# Altium PCB Vario_pcb_2l.PcbDoc (part 2 of 2)
Units mil, origin at the board's own origin, x right, y up, seen from the top; angles counter-clockwise.
Board outline 2755.91 x 1968.5 mil, 2 copper layers (Top Layer, Bottom Layer), stack 34.296 mil thick; 124 components, 101 nets, 543 pads, 304 vias.
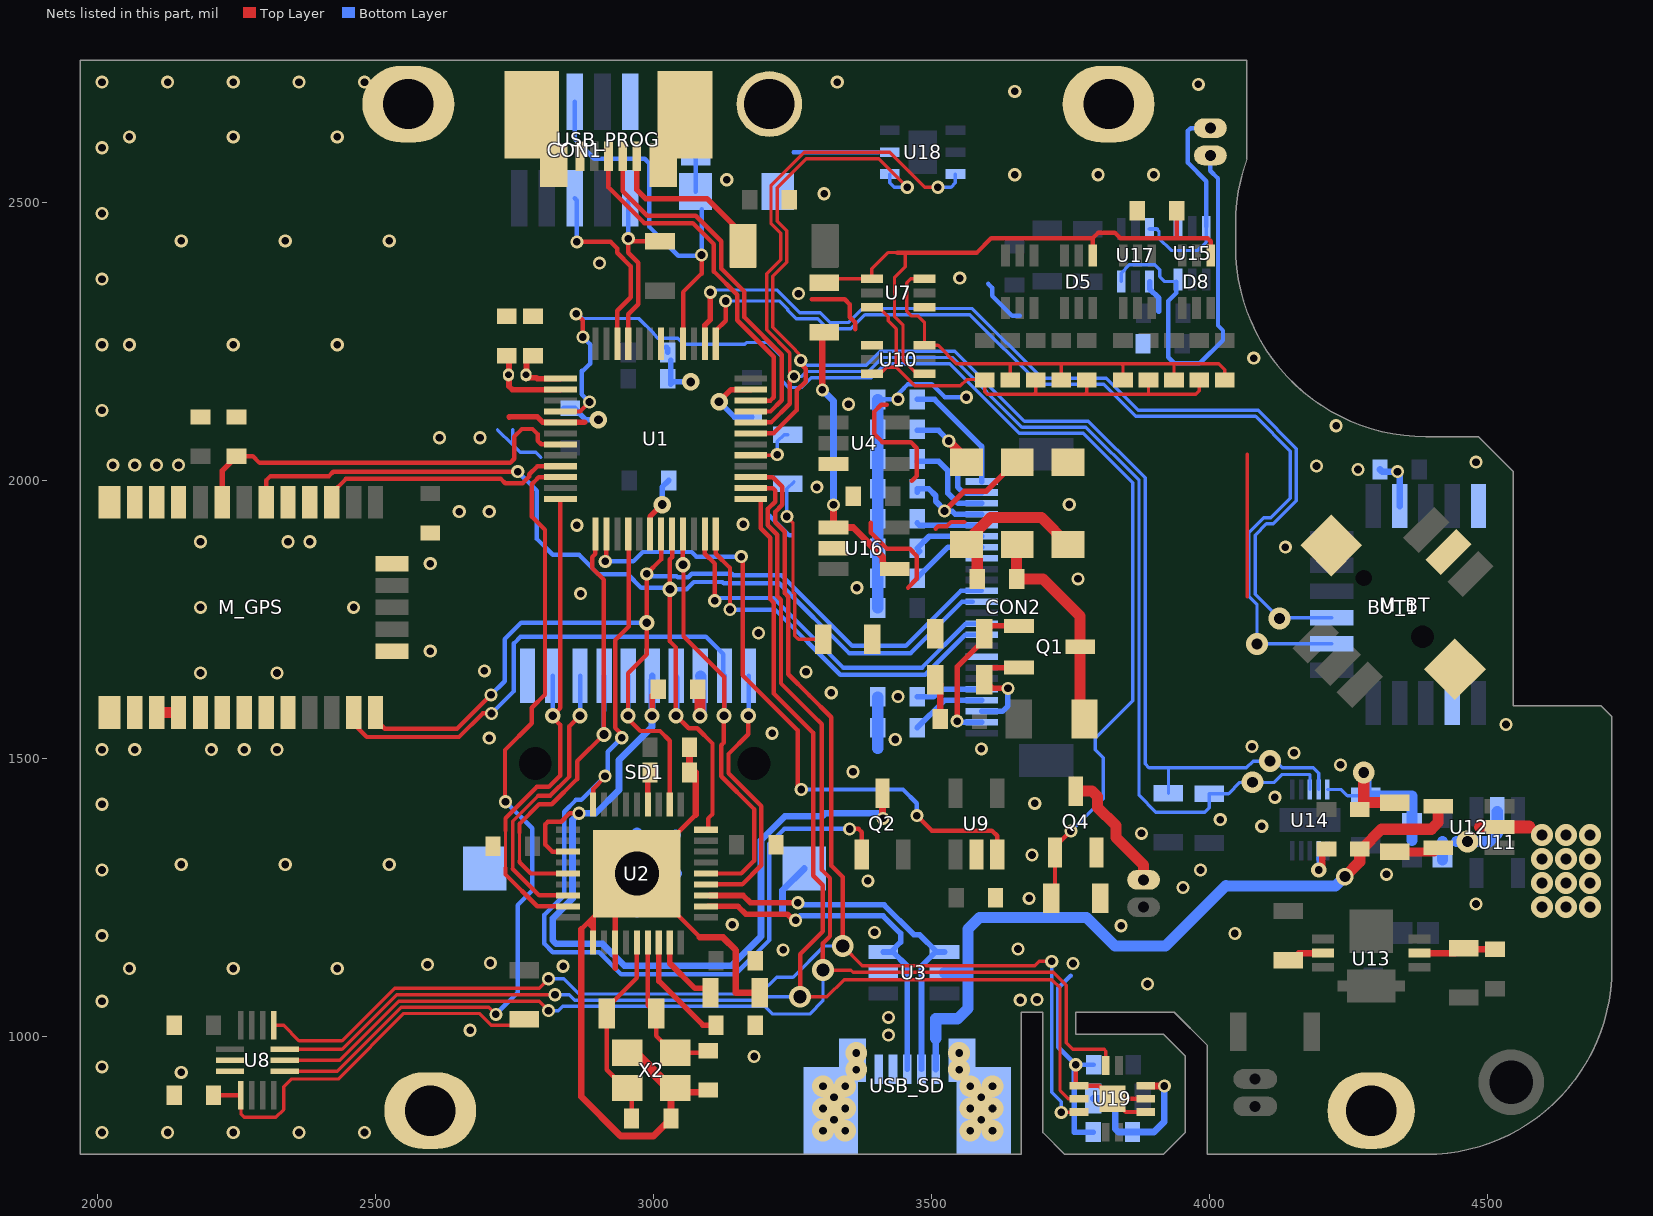
[diagram p2: the nets of this part, all layers, seen from the top]

## Via types
v1: diameter 23.62, hole 13.78, Top Layer to Bottom Layer, tented both sides, 227 vias
v2: diameter 39.37, hole 19.68, Top Layer to Bottom Layer, tented both sides, 22 vias
v3: diameter 39.37, hole 13.78, Top Layer to Bottom Layer, 20 vias
v4: diameter 31.5, hole 15.75, Top Layer to Bottom Layer, tented both sides, 10 vias
v5: diameter 27.56, hole 15.75, Top Layer to Bottom Layer, tented both sides, 9 vias
v6: diameter 31.5, hole 19.68, Top Layer to Bottom Layer, tented both sides, 5 vias
v7: diameter 39.37, hole 19.68, Top Layer to Bottom Layer, 4 vias
v8: diameter 39.37, hole 23.62, Top Layer to Bottom Layer, 3 vias
v9: diameter 27.56, hole 15.75, Top Layer to Bottom Layer, 3 vias
v10: diameter 27.56, hole 13.78, Top Layer to Bottom Layer, tented both sides, 1 vias

## Nets (pads, with @x,y where several pads share a name; then routed paths per layer and width w, separated by ;. In a path a pad name is that pad's centre, name@x,y a point inside that pad or via, vN(x,y) a via of type N, cw(c..) or ccw(c..) an arc to the next point about the centre after c; other vN are vias at no path point) (continued)
DISP_D/C: CON2.14 U1.23 | length 707.8
  Top Layer w8: U1.23@3092.52,1903.54 3092.52,1868.11 3110.24,1850.39 v1(3110.24,1783.46)
  Bottom Layer w8: v1(3110.24,1783.46) 3110.24,1781.2 3114.72,1776.72 3114.72,1787.94 3115.3,1788.53 3216.11,1788.53 3341.24,1663.39 3483.34,1663.39 3562.08,1742.13 CON2.14@3590.55,1742.13
DISP_RST: CON2.15 U1.24 | length 677.6
  Top Layer w8: U1.24@3112.2,1903.54 3112.2,1868.11 3137.8,1842.52 v1(3137.8,1767.72)
  Bottom Layer w8: v1(3137.8,1767.72) 3218.53,1767.72 3335.86,1650.39 3488.97,1650.39 3561.02,1722.44 CON2.15@3590.55,1722.44
GDR: CON2.23 Q1.1 R6.1 | length 298.6
  Top Layer w10: v1(3546.34,1566.93) 3546.34,1664.45 3595.47,1713.58 R6.1@3595.47,1724.41 3609.25,1738.19 Q1.1@3657.48,1738.19
  Bottom Layer w10: v1(3546.34,1566.93) 3546.34,1560.12 3551.18,1564.96 CON2.23@3590.55,1564.96
GND: B1.1 BUT1.5 BUT1.7 BUT1.8 C11.1 C12.1 C13.1 C14.1 C15.1 C16.1 C17.1 C18.1 C19.1 C20.2 C21.1 C22.1 C23.1 C24.1 C25.1 C26.1 C27.1 C28.1 C29.2 C30.2 C31.2 C32.1 C33.1 C34.1 C35.1 C36.2 C37.2 C38.1 C39.2 C40.1 C41.1 C43.1 C44.1 C47.1 C51.2 C52.2 C53.1 C54.2 C55.1 C56.1 C58.1 C59.1 C60.1 CON1.10 CON2.8 CON2.17 D1.K M_BT.2 M_BT.13 M_GPS.4 M_GPS.5 M_GPS.10 M_GPS.11 M_GPS.12 M_GPS.13 M_GPS.14 M_GPS.15 M_GPS.18 M_GPS.19 M_GPS.20 M_GPS.21 M_GPS.22 M_GPS.27 M_GPS.31 pad.2 pad.3@2559.06,2677.17 pad.3@3208.66,2677.17 pad.3@3818.9,2677.17 pad.3@4291.34,866.14 Q4.2 R6.2 R7.2 R8.2 R9.1 R10.2 R12.1 R13.1 SD1.6 SD1.CD2 SD1.fix U1.5 U1.18 U1.35 U1.42 U2.28 U2.30 U2.PAD U3.2 U4.3 U7.1 U8.6 U8.7 U9.2 U10.1 U11.2 U12.2 U14.5 U15.1 U16.2 U17.1 U18.2 U19.3 U19.8 U19.9 U19.PAD USB_PROG.5 USB_PROG.6 USB_SD.4 USB_SD.5 USB_SD.6 X2.2 X2.4 | length 6433.5
  Top Layer w6: 4068.12,1790.15 4068.12,2047.24
  Top Layer w8: 2870.08,1192.55 U2.PAD@2970.31,1292.79 3076,1398.47 ; U2.PAD@2970.31,1291.53 3083.92,1177.92 ; 3285,2326 3344,2326 3353.39,2316.61 3353.39,2293.7 3363,2284.09 3363,2272 ; 3391,1923.83 3391,1906.26 3420.26,1877 3461,1877 3474,1864 3474,1823 3458,1807 ; 3420,2136 3409.82,2136 3397,2123.18 3397,2084 3412,2069 3463,2069 3474,2058 3474,2008 3465,1999 ; 3507.87,1913.39 3512.39,1917.9 3528.14,1917.9 3535.43,1925.2 3559.06,1925.2 ; v1(3759.84,948.82) 3759.84,916.88 U19.3@3765.72,911 3802.14,911 U19.PAD@3825.76,887.38 ; U19.8@3885.8,863.76 3849.39,863.76 U19.PAD@3825.76,887.38 ; U19.9@3885.8,887.38 U19.PAD@3825.76,887.38
  Top Layer w10: 2740.71,2114.17 2740.97,2114.43 2791.08,2114.43 2801.18,2104.33 U1.5@2832.68,2104.33 2875.98,2104.33 ; 2885.88,1201.34 2891.57,1195.64 ; U2.28@2891.57,1168.77 2891.57,1195.64 ; 2891.57,1212.79 2891.57,1195.64 ; 2930.94,1122.24 U2.30@2930.94,1164.83 ; U2.30@2930.94,1168.77 2930.94,1252.16 U2.PAD@2970.31,1291.53 ; U1.18@2994.09,1903.54 2994.09,1935.04 v4(3015.75,1956.69) ; v4(3118.11,2141.73) 3139.76,2163.39 U1.35@3175.2,2163.39
  Top Layer w12: 2870.08,1192.55 2870.08,891.39 2940.94,820.52 3000,820.52 C29.2@3031.5,852.02 3031.5,899.26 C20.2@3098.43,899.26 ; U2.PAD@2970.31,1291.53 U2.PAD@2970.31,1292.79 ; C24.1@3064.8,1519.87 C25.1@3064.8,1474.44 3076,1474.44 3076,1398.47 ; 3083.92,1177.92 3125.08,1177.92 3148,1155 3148,1078.5 3148.5,1078 R10.2@3191.29,1078 ; R7.2@3506.89,1641.73 3515.75,1632.87 C58.1@3515.75,1570.87
  Top Layer w16: BUT1.5@4430.23,1871.18 BUT1.5@4434.17,1871.18
  Top Layer w20: X2.2@2960.63,978 X2.2@2952.76,970.13 2965.87,970.13 3028.87,907.13 X2.4@3039.37,907.13 ; C27.1@3079.72,1624.05 3083.67,1620.1 v5(3083.67,1576.8) ; v2(4277.99,1474.84) 4277.99,1420.28 R12.1@4333.66,1420.28 ; 4486.65,1376.42 U12.2@4522.09,1376.42
  Top Layer w23.62: U12.2@4522.09,1376.42 4574.8,1376.42
  Bottom Layer w6: 2719.42,2091.54 2747,2063.96 ; 2747,2091 2747,2063.96 ; 2797.24,2041.34 2788.02,2050.56 2779.36,2050.56 2770.32,2050.56 2760.4,2050.56 2747,2063.96 ; U14.5@4212.6,1443.9 4237.2,1443.9 4248.58,1432.52 R13.1@4281.93,1432.52
  Bottom Layer w8: 3209,1936.57 3244.57,1901 3249,1901 ; 3251.97,2590.55 3405.51,2590.55 ; C19.1@3403.54,2145.67 3430.67,2145.67 3451.63,2166.63 3451.63,2167.11 3457.9,2173.39 3500.61,2173.39 3524.4,2149.6 v1(3562.99,2149.6) ; 3602,2354 3609.18,2346.82 3609.18,2332.28 3645.46,2296 3659,2296 ; 3750.98,1109.25 3728.54,1086.8 3728.54,980.13 v1(3759.84,948.82) C32.1@3792.32,948.82
  Bottom Layer w10: C11.1@2838.58,2129.92 2858.08,2129.92 2879,2109 v4(2901,2109) ; v4(3015.75,1956.69) 3015.75,1988.19 C52.2@3027.56,2000 ; C13.1@3023.13,2239.66 3025.59,2237.2 C13.1@3025.59,2230.32 ; C13.1@3031.5,2216.54 3031.5,2173.23 3035.43,2177.17 v4(3066.93,2177.17) ; v4(3118.11,2141.73) 3145.67,2114.17 C53.1@3177.17,2114.17 ; v1(3759.84,948.82) 3757.03,946.01 3757.03,827.67 C38.1@3791.09,827.67 ; U17.1@3892.7,2357.83 3892.7,2344.76 3909.45,2328.02 3909.45,2304.39
  Bottom Layer w12: v1(3141.73,1200.79) v1@3145.67,1204.72 ; 3232.28,1224.19 3232.28,1262.71 SD1.fix@3271.5,1301.92 ; C39.2@4307.09,2019.68 4311.02,2015.75 v1(4338.58,2015.75) 4342.52,2011.81 M_BT.13@4342.52,1953.94
  Bottom Layer w20: 2923.23,1339.87 U2.PAD@2970.31,1292.79 ; 2928.24,1250.72 U2.PAD@2970.31,1292.79 ; 2970.31,1223.27 U2.PAD@2970.31,1292.79 ; 2970.31,1365.98 U2.PAD@2970.31,1292.79 ; 3026.88,1236.22 U2.PAD@2970.31,1292.79 ; 3039.37,1361.84 U2.PAD@2970.31,1292.79 ; 3041.8,1292.79 U2.PAD@2970.31,1292.79 ; SD1.6@3084.49,1648.38 3085.63,1647.24 v5@3085.63,1575.82 ; 3403.54,1517.72 C40.1@3403.54,1555.12 C44.1@3403.54,1610.67 ; C59.1@3403.54,1770.56 C12.1@3403.54,1824.15 C14.1@3403.54,1877.73 C15.1@3403.54,1931.32 C16.1@3403.54,1984.91 C17.1@3403.54,2038.5 C18.1@3403.54,2092.08 C19.1@3403.54,2145.67 ; v2@4282.05,1474.84 v2(4277.99,1474.84) 4281.93,1470.91 R13.1@4281.93,1432.52 4364.61,1432.52 C41.1@4364.61,1388.23 4364.61,1351.93 ; C28.1@4419.72,1317.36 4419.72,1350.39 ; v2@4444.88,1350.39 v2(4464.56,1350.39) 4500.87,1350.39 4502.4,1348.86 4518.15,1364.61 U11.2@4518.15,1403.98
  other v1: 2007.87,826.77 2125.98,826.77 2244.09,826.77 2362.2,826.77 2480.32,826.77 2150.59,935.04 2007.87,944.88 3181.1,963.58 3423,1002 2670.28,1010.83 3423,1034 2007.87,1062.99 3660,1065 3690,1066 3889,1094 2057.09,1122.05 2244.09,1122.05 2431.1,1122.05 2837.6,1125.98 2593.5,1128.94 3754.92,1130.91 2706.69,1131.89 3233.27,1155.51 3656,1157 2007.87,1181.1 4046,1185 3397.64,1187.01 3841.54,1198.82 4480,1238 3676,1248 3952.76,1267.72 3385.83,1279.53 4318.9,1291.34 2007.87,1299.21 3984.25,1299.21 2150.59,1309.06 2337.6,1309.06 2524.61,1309.06 3681,1326 3878,1365 4094.49,1377.95 4019.68,1389.76 2007.87,1417.32 3686,1419 4118.11,1430.12 3359,1476 4236.22,1488.19 4152.56,1509.84 2007.87,1515.75 2066.93,1515.75 2204.72,1515.75 2263.78,1515.75 2322.83,1515.75 3590,1517 4077,1521 3435,1534 2704.72,1536.42 3213.58,1545.28 4534,1561 3440,1611 3319.88,1618.11 2185.04,1653.54 2322.83,1653.54 3274.61,1655.51 2695.87,1657.48 2598.43,1692.91 3188.98,1725.39 2185.04,1771.65 2460.63,1771.65 2869.09,1796.26 3366,1807 3763.78,1822.83 2598.43,1850.39 4137,1880 2185.04,1889.76 2342.52,1889.76 2381.89,1889.76 2862.2,1919.29 3161.42,1921.26 2650.59,1943.9 2704.72,1943.9 3748.03,1956.69 3294,1988 4267.72,2019.68 4193,2026 2027.56,2027.56 2066.93,2027.56 2106.3,2027.56 2145.67,2027.56 4480,2033 2615.16,2076.77 2687.99,2076.77 4228.35,2098.43 2007.87,2125.98 3351,2137 3440,2146 4080,2220 2007.87,2244.09 2057.09,2244.09 2244.09,2244.09 2431.1,2244.09 3261,2336 2007.87,2362.2 3551,2364 2903,2391 2150.59,2431.1 2337.6,2431.1 2524.61,2431.1 2007.87,2480.31 3307.09,2515.75 3132,2541 3650,2550 3800,2550 3900,2550 2007.87,2598.43 2057.09,2618.11 2244.09,2618.11 2431.1,2618.11 3650,2700 3980.32,2712.6 2007.87,2716.54 2125.98,2716.54 2244.09,2716.54 2362.2,2716.54 2480.32,2716.54 3330.71,2716.54
  other v2: 4598.43,1232.28 4641.73,1232.28 4685.04,1232.28 4598.43,1275.59 4641.73,1275.59 4685.04,1275.59 4598.43,1318.9 4641.73,1318.9 4685.04,1318.9 4598.43,1362.2 4641.73,1362.2 4685.04,1362.2
  other v3: 3305,830 3345,830 3570,830 3610,830 3325,850 3590,850 3305,870 3345,870 3570,870 3610,870 3325,890 3590,890 3305,910 3345,910 3570,910 3610,910 3365,940 3550,940 3365,970 3550,970
GPS_BCKP: C35.2 M_GPS.8 U1.7 | length 747.9
  Top Layer w8: C35.2@2250,2043.31 2279.53,2043.31 2291.34,2031.5 2742.22,2031.5 2749.86,2039.13 2749.86,2078.99 2763.39,2092.52 2782.48,2092.52 2791.48,2083.52 2791.48,2071.52 2798.04,2064.96 U1.7@2832.68,2064.96
  Top Layer w10: M_GPS.8@2224.41,1960.63 2224.41,2017.72 C35.2@2250,2043.31
GPS_CS: M_GPS.3 U1.9 | length 456.8
  Top Layer w8: M_GPS.3@2421.26,1960.63 2421.26,1977.29 2446.71,2002.75 2725.6,2002.75 2733.41,1994.94 2764.53,1994.94 2776.72,2007.13 2776.72,2010.97 2791.34,2025.59 U1.9@2832.68,2025.59
HEAT: Q4.1 R8.1 U1.4 | length 2253.6
  Top Layer w8: U1.4@2832.68,2124.02 2868.02,2124.02 v1(2885,2141) ; v1(2860.91,2299.62) 2861.8,2299.62 2873,2288.42 v1(2873,2258) ; R8.1@3715.55,1248.03 3722.44,1254.92 Q4.1@3722.44,1330.71 3722.44,1340.55 v1(3751,1369.11)
  Bottom Layer w6: v1(2860.91,2299.62) 2864.72,2299.62 2873,2291.34 2973.66,2291.34 3000.18,2264.82 3000.18,2263.6 3007.75,2256.03 3043.76,2256.03 3054.88,2244.91 3164.08,2244.91 3167.33,2248.16 3205.48,2248.16 3232,2221.64 3232,2179 3243.81,2167.19 3266.17,2167.19 3283.98,2185 3391.81,2185 3417,2210.19 3533.01,2210.19 3658.42,2084.77 3773.5,2084.77 3862.64,1995.63 3862.64,1603.64 3795.15,1536.15 3795.15,1515.42 3809.34,1501.23 3809.34,1427.45 v1(3751,1369.11)
  Bottom Layer w8: v1(2873,2258) 2886,2245 2886,2210 2873,2197 2871.27,2197 2871.27,2154.73 v1(2885,2141)
IMU_CS: U1.10 U8.12 | length 1530.8
  Top Layer w6: U8.12@2336.61,937.01 2431.45,937.01 2546.44,1051.99 2703.91,1051.99 v1(2716.53,1039.37)
  Top Layer w8: v1(2734,1422) 2733,1423 2733,1515 2781.15,1563.15 2781.15,1591.01 2804.91,1614.78 2804.91,1911.28 2781.15,1935.04 2781.15,1993.18 2789.72,2001.74 2789.72,2002.31 2793.31,2005.91 U1.10@2832.68,2005.91
  Bottom Layer w8: v1(2716.53,1039.37) 2755.72,1078.55 2755.72,1236.03 2782,1262.31 2782,1374 v1(2734,1422)
LED: D9.1 U1.29 | length 96
  Top Layer w6: U1.29@3175.2,2045.28 3221.74,2045.28 v1(3222.86,2046.4)
  Bottom Layer w6: v1(3222.86,2046.4) 3222.86,2070.14 3235.02,2082.29 D9.1@3242,2082.29
MISO: M_GPS.25 SD1.7 U1.21 U2.5 | length 1688.6
  Top Layer w8: M_GPS.25@2460.63,1582.68 2460.63,1561.76 2484,1538.39 2650.24,1538.39 2692.67,1580.82 v1(2708.79,1580.82) 2713.51,1580.82 v1@2714.57,1579.76 ; U1.21@3053.15,1903.54 v9(3053.15,1848.42) 3054.13,1847.44 3054.13,1719.52 3127.8,1645.86 v5@3127.8,1576.8 ; U2.5@3098.27,1292.79 3158.25,1292.79 3181.1,1315.64 3181.1,1408.81 3122.05,1467.87 3122.05,1523.62 3126.82,1528.39 v5(3126.82,1576.8)
  Bottom Layer w8: v1(2708.79,1580.82) 2749.02,1621.04 2749.02,1706.72 2760.83,1718.54 3094.49,1718.54 3125.98,1687.04 SD1.7@3125.98,1650.19 ; v5@3127.8,1576.8 SD1.7@3127.8,1648.38
  Bottom Layer w10: SD1.7@3125.98,1650.19 SD1.7@3127.8,1648.38
MISO_IRQ: U1.27 U8.1 U19.5 | length 2779.5
  Top Layer w6: U8.1@2316.93,1019.69 2334.65,1019.69 2362.33,992 2439.77,992 2534.39,1086.61 2794.29,1086.61 v1(2811.1,1103.43) ; v8(3340.55,1162.4) 3375.95,1127 3686,1127 3693.84,1134.84 v1(3716.54,1134.84) ; v1(3733.7,863) 3764.97,863 U19.5@3765.72,863.76
  Top Layer w8: U1.27@3175.2,2005.91 3214.57,2005.91 3232,1988.47 3232,1956.43 3218.91,1943.34 3218.91,1924.86 3236,1907.77 3236,1797.3 3242.54,1790.77 3242.54,1651.17 3279.85,1613.85 3279.99,1613.85 3320,1573.84 3320,1307.09 3340.55,1286.54 v8(3340.55,1162.4)
  Bottom Layer w6: v1(2811.1,1103.43) 2838.58,1103.43 2865.95,1076.06 3191.4,1076.06 3221.55,1106.21 3251.11,1106.21 3307.3,1162.4 v8(3340.55,1162.4) ; v1(3716.54,1134.84) 3716.54,899.17 3733.7,882 v1(3733.7,863)
MOSI: CON2.11 M_GPS.26 SD1.3 U1.19 U2.11 | length 1953.3
  Top Layer w8: M_GPS.26@2500,1582.68 2500,1569.88 2516.73,1553.15 2646.62,1553.15 v1(2707.68,1614.2) ; v5(2954.24,1576.8) 2954.24,1653.24 2988,1687 v9(2988,1744.13) v1(2988,1832) 3013.78,1857.78 U1.19@3013.78,1903.54 ; v5@2956.9,1568.72 2976.38,1549.24 3011.81,1549.24 3029.37,1531.69 U2.11@3029.37,1420.74
  Bottom Layer w8: v1(2707.68,1614.2) 2732.28,1638.81 2732.28,1714.6 2761.81,1744.13 v9@2985.87,1744.13 ; v5@2954.57,1576.8 SD1.3@2954.57,1648.38 ; v1(2988,1832) 2992.19,1827.81 3041.55,1827.81 3043.71,1825.65 3062.59,1825.65 3068.94,1832 3141.18,1832 3144,1829.19 3230.6,1829.19 3357.4,1702.39 3454.26,1702.39 3553.05,1801.18 CON2.11@3590.55,1801.18
MOSI_IRQ: U1.25 U8.14 U19.4 | length 2662.7
  Top Layer w6: U8.14@2336.61,976.38 2439.71,976.38 2538.13,1074.8 v1(2822.83,1074.8) ; v8(3264,1071) 3312.14,1071 3342.95,1101.81 3716.91,1101.81 3731.47,1087.25 3731.47,902.39 3746.48,887.38 U19.4@3765.72,887.38
  Top Layer w8: U1.25@3175.2,1966.54 3192.91,1966.54 3192.91,1914.09 3210,1897 3210,1786.54 3216.54,1780 3216.54,1616.66 3287.4,1545.8 3287.4,1288.96 3304.71,1271.65 3304.71,1188.57 3264,1147.86 v8(3264,1071)
  Bottom Layer w6: v1(2822.83,1074.8) 2848.52,1074.8 2858.27,1065.06 3195.96,1065.06 3201.9,1071 v8(3264,1071)
NetC12_2: C12.2 CON2.7 | length 139.2
  Bottom Layer w10: C12.2@3474.41,1824.15 3530.18,1879.92 CON2.7@3590.55,1879.92
NetC14_2: C14.2 CON2.6 | length 132.2
  Bottom Layer w10: C14.2@3474.41,1867.89 C14.2@3479.33,1872.81 ; C14.2@3474.41,1877.73 3496.28,1899.61 CON2.6@3590.55,1899.61
NetC15_2: C15.2 CON2.5 | length 117.9
  Bottom Layer w10: C15.2@3474.41,1923.45 3478.57,1919.29 CON2.5@3590.55,1919.29
NetC17_2: C17.2 CON2.3 | length 171.6
  Bottom Layer w10: C17.2@3474.41,2034.56 3512.98,2034.56 3529.53,2018.01 3529.53,1997.37 3529.68,1997.22 3529.68,1979.15 3529.53,1979 3529.53,1977.22 3548.08,1958.66 CON2.3@3590.55,1958.66
NetC19_2: C19.2 CON2.1 | length 214.2
  Bottom Layer w10: C19.2@3474.41,2145.67 3505.91,2145.67 3590.55,2061.02 CON2.1@3590.55,1998.03
NetC20_1: C20.1 R3.2 U2.33 X2.1 | length 276.5
  Top Layer w8: U2.33@2990,1164.83 2990,1055.91 R3.2@3004.92,1040.99 3004.92,1000.64 3035.43,970.13 C20.1@3098.43,970.13
NetC25_2: C25.2 U2.13 | length 48.8
  Top Layer w10: U2.13@2990,1420.74 2990,1469.36 C25.2@2990.16,1469.52
NetC26_2: C26.2 U2.34 | length 201.3
  Top Layer w10: U2.34@3009.68,1164.83 3009.68,1099.32 3089,1020 C26.2@3112.57,1020
NetC27_2: C27.2 Q2.3 SD1.4 U2.21 | length 1652.9
  Top Layer w8: U2.21@2842.36,1332.16 2818.25,1332.16 2805.77,1344.64 2805.77,1381.56 2810.25,1386.04 2834.04,1386.04 2849.19,1401.19 v1(2866,1401.19)
  Top Layer w10: v5@2998.03,1573.85 2998.03,1613.22 C27.2@3008.86,1624.05
  Top Layer w12: Q2.3@3412,1437.12 3412,1393 v1(3413,1392)
  Bottom Layer w12: SD1.4@2997.87,1648.38 2997.87,1641 2997.38,1640.51 v5(2997.38,1576.8) 2997.38,1556.44 2937.97,1497.03 2937.97,1442.97 2896.19,1401.19 v1(2866,1401.19) 2854.33,1389.52 2854.33,1247.63 2818.9,1212.2 2818.9,1172.46 2825.19,1166.16 2908.64,1166.16 2948.01,1126.8 3140.75,1126.8 3193.66,1179.71 3193.66,1352.67 3236.8,1395.81 3304,1395.81 3309.19,1401 3410,1401 3413,1398 v1(3413,1392)
  Bottom Layer w16: v5@2998.03,1573.85 v5@3000,1571.88
NetC29_1: C29.1 R3.1 U2.32 X2.3 | length 353.6
  Top Layer w8: C29.1@2960.63,852.02 2960.63,895.37 2916.2,939.8 2916.2,1040.85 R3.1@2916.34,1040.99 2916.34,1051.34 2970.31,1105.31 U2.32@2970.31,1164.83
NetC30_1: C30.1 U1.1 X1.2 | length 106.1
  Top Layer w10: C30.1@2783.46,2224.41 2771.65,2212.6 2771.65,2188.98 2771.65,2185.04 2789.37,2185.04 2791.34,2183.07 U1.1@2832.68,2183.07
NetC31_1: C31.1 U1.2 X1.1 | length 144
  Top Layer w10: C31.1@2736.22,2216.54 2740.16,2212.6 2740.16,2185.04 2740.16,2169.29 2746.22,2163.23 2793.15,2163.23 2793.31,2163.39 U1.2@2832.68,2163.39
NetC33_2: C33.2 L3.1 U8.8 | length 709.9
  Top Layer w6: U8.8@2257.87,893.7 2257.87,860.24 2263.78,854.33 2320.77,854.33 2334.65,868.21 2334.65,909.45 2348.28,923.09 2433.09,923.09 2550.99,1040.99 2686.89,1040.99 2708.32,1019.56 2756.76,1019.56 L3.1@2767.72,1030.51
  Top Layer w8: C33.2@2208.66,893.7 U8.8@2257.87,893.7
NetC38_2: C38.2 L2.1 U19.10 | length 282
  Top Layer w12: U19.10@3885.8,911 3886.37,910.43 v1(3919.29,910.43)
  Bottom Layer w12: L2.1@3791.41,888 3816.72,888 3830.71,874.02 3830.71,833.66 3836.7,827.67 C38.2@3861.96,827.67 3900.5,827.67 3919.29,846.46 v1(3919.29,910.43)
NetC40_2: C40.2 CON2.21 | length 136.5
  Bottom Layer w10: C40.2@3474.41,1555.12 3523.62,1604.33 CON2.21@3590.55,1604.33
NetC42_2: C42.2 U14.7 | length 74.9
  Top Layer w12: v10(4196.85,1299.21) 4203.19,1305.55 C42.2@4203.19,1337.05
  Bottom Layer w8: v10(4196.85,1299.21) U14.7@4196.85,1333.66
NetC44_2: C44.2 CON2.20 | length 121.7
  Bottom Layer w10: C44.2@3474.41,1610.67 3503.66,1610.67 3517,1624.02 CON2.20@3590.55,1624.02
NetC46_2: C46.2 R11.1 U13.5 | length 130.6
  Top Layer w12: U13.5@4377.95,1149.61 4401.57,1149.61 4442.31,1149.6 R11.1@4449,1156.29 ; R11.1@4458,1158.29 4459.86,1156.43 C46.2@4514,1156.43
NetC48_1: C48.1 D3.A L1.2 Q1.3 | length 361.8
  Top Layer w20: D3.A@3654.53,1884.82 3653.54,1883.84 C48.1@3653.54,1822.83 3700.79,1822.83 3767.72,1755.91 Q1.3@3767.72,1700.79 L1.2@3767.72,1598.4
NetC48_2: C48.2 D1.A D2.K | length 296.1
  Top Layer w20: C48.2@3582.68,1822.83 3582.68,1865.14 D2.K@3562.99,1884.82 3562.99,1889.76 3606.3,1933.07 3697.81,1933.07 D1.A@3746.06,1884.82
NetCON_HEAT_2: CON_HEAT.2 Q4.3 | length 227.1
  Top Layer w20: Q4.3@3759.84,1440.94 3789.06,1440.94 3799,1431 3799,1412 3832,1379 3832,1357.89 3881.89,1308 CON_HEAT.2@3881.89,1281.5
NetD9_2: D9.2 R9.2 | length 342.5
  Top Layer w6: v1(3240,1935) 3251,1924 3251,1799.28 3254.54,1795.74 3254.54,1720.46 3261,1714 R9.2@3305.42,1714
  Bottom Layer w6: v1(3240,1935) 3240,1985 D9.2@3253,1998
NetM_GPS_16: M_GPS.16 M_GPS.17 | length 39.4
  Top Layer w20: M_GPS.16@2106.3,1582.68 M_GPS.17@2145.67,1582.68
NetR10_1: R10.1 U2.35 | length 125.6
  Top Layer w10: U2.35@3029.37,1164.83 3029.37,1131.43 3074.8,1086 R10.1@3102.71,1086
NetR12_2: R12.2 U12.5 | length 81.2
  Top Layer w16: R12.2@4333.66,1331.69 4404.53,1331.69 U12.5@4411.85,1339.02
NetR14_2: R14.2 U13.2 | length 43.3
  Top Layer w12: R14.2@4161.42,1149.61 U13.2@4204.72,1149.61
NetR18_1: R18.1 U16.1 U16.4 | length 522.1
  Top Layer w12: v1(3304,2163) 3304,2256.71 R18.1@3322,2274.71 ; v1(3324,1956) v1(3324,1956) U16.1@3324.05,1915.27 3359.48,1915.27 3412.37,1862.37 3412.37,1852.63 3424.54,1840.46 U16.4@3434.28,1840.46
  Bottom Layer w12: v1(3304,2163) 3324,2143 v1(3324,1956)
NetU2_2: U2.2 U3.3 USB_SD.3 | length 653.1
  Top Layer w10: U2.2@3098.27,1233.73 3152.13,1233.73 3166.34,1219.52 3241.11,1219.52 3251.97,1208.66 v1(3255.9,1208.66)
  Bottom Layer w10: v1(3255.9,1208.66) 3263.78,1216.54 3413.39,1216.54 3444.88,1185.04 3444.88,1169.29 U3.3@3427.17,1151.57 ; U3.3@3413.39,1151.57 U3.3@3427.17,1151.57 ; USB_SD.3@3456.69,940.94 3456.69,1125.98 3431.1,1151.57 U3.3@3427.17,1151.57
NetU2_3: U2.3 U3.4 USB_SD.2 | length 688.3
  Top Layer w10: U2.3@3100.94,1253.26 3161.42,1253.26 3174.52,1240.16 v1(3259.84,1240.16)
  Bottom Layer w10: v1(3259.84,1240.16) 3263.78,1236.22 3414.91,1236.22 3468.5,1182.63 3478.79,1182.63 U3.4@3509.84,1151.57 ; USB_SD.2@3482.28,940.94 3482.28,1125.98 3486.85,1130.55 3486.85,1131.11 3507.31,1151.57 U3.4@3509.84,1151.57 ; U3.4@3523.62,1151.57 U3.4@3509.84,1151.57
P2_0: M_BT.16
PIEZO+: CON_BUZ.2 U15.3 U17.6 | length 387.8
  Bottom Layer w6: 3905.51,2452.32 3909.45,2448.38 3909.45,2435.78 3931.41,2413.82 3979.74,2413.82 3994.78,2428.86 U15.3@3994.78,2456.06
  Bottom Layer w8: U17.6@3892.7,2452.32 3905.51,2452.32 ; U15.3@3994.78,2456.06 3994.78,2538.39 3961.61,2571.55 3961.61,2628.94 3966.54,2633.86 CON_BUZ.2@4001.97,2633.86
PIEZO-: CON_BUZ.1 U15.6 U17.3 | length 743.9
  Bottom Layer w6: U17.3@3841.52,2357.83 3841.52,2373.14 3856.19,2387.81 3902.19,2387.81 3911.19,2378.81 3911.19,2366.81 3920.17,2357.83 U15.6@3940.6,2357.83
  Bottom Layer w8: U15.6@3940.6,2357.83 3940.6,2337.22 3926.19,2322.81 3926.19,2221.81 3937.19,2210.81 3983.09,2210.81 4024.74,2252.46 4024.74,2269.7 4015.73,2278.71 4015.73,2543.32 4001.97,2557.09 CON_BUZ.1@4001.97,2584.65
POWER_ENA: U1.14 U9.3 | length 1202.3
  Top Layer w8: v1(2913.39,1854.33) 2915.35,1856.3 U1.14@2915.35,1903.54 ; v1(3158,1863) 3160.81,1860.19 3160.81,1649.23 3259.86,1550.18 3259.86,1450.14 v1(3266,1444) ; v1(3474,1397) 3501,1370 3609,1370 3618.4,1360.6 U9.3@3618.4,1326.88
  Bottom Layer w8: v1(2913.39,1854.33) 2963.77,1854.33 2980.65,1871.2 3068.9,1871.2 3077.1,1863 v1(3158,1863) ; v1(3266,1444) 3449,1444 3474,1419 v1(3474,1397)
PREVGH: C16.2 CON2.4 D3.K | length 317.1
  Top Layer w10: v1(3523.62,1944.88) 3559.06,1980.32 3598.43,1980.32 3650.57,2032.46 D3.K@3654.53,2032.46
  Bottom Layer w10: C16.2@3474.41,1979 3474.41,1980.32 C16.2@3479,1984.91 ; C16.2@3474.41,1984.91 C16.2@3479,1984.91 ; CON2.4@3590.55,1938.98 3543.31,1938.98 3537.4,1944.88 v1(3523.62,1944.88) 3523.62,1946.84 3507.87,1962.59 3507.87,1972.44 3495.41,1984.91 C16.2@3479,1984.91
PREVGL: C18.2 CON2.2 D2.A | length 253.7
  Top Layer w16: v1(3531.36,2071) 3562.99,2039.37 D2.A@3562.99,2032.46
  Bottom Layer w10: C18.2@3474.41,2090.11 3512.98,2090.11 3547.24,2055.85 3547.24,1988.19 3557.09,1978.35 CON2.2@3590.55,1978.35
PUMP+: C2.2 C4.2 C6.2 C8.2 C10.2 U7.3 U10.6 | length 864.1
  Top Layer w6: U7.3@3487.57,2362.81 3463.2,2362.81 3455.69,2355.31 3455.69,2304.63 3464.57,2295.76 3476.24,2295.76 3487.57,2284.43 U10.6@3487.57,2243 3512,2243 3545,2210 3640,2210 ; C4.2@3642.09,2180.81 3642.09,2207.91 3640,2210 ; C2.2@3733.65,2180.81 3733.65,2209.35 3733,2210 ; C10.2@3844.89,2180.81 3844.89,2206.11 3841,2210 ; C8.2@3936.44,2180.81 3936.44,2209.56 3936,2210 ; C6.2@4028,2180.81 4028,2199.38 4017.38,2210 3936,2210 ; 3640,2210 3733,2210 ; 3733,2210 3841,2210 ; 3841,2210 3936,2210
PUMP-: C1.2 C3.2 C5.2 C7.2 C9.2 U7.6 U10.3 | length 854.4
  Top Layer w6: U10.3@3393.08,2191.82 3407.82,2191.82 3419.51,2203.51 3437,2203.51 ; U7.6@3393.08,2311.63 3405.37,2311.63 3422.69,2294.31 3422.69,2286.86 3437,2272.56 3437,2203.51 ; C5.2@3579,2181.51 3563.51,2181.51 3552.19,2170.19 3470.32,2170.19 3437,2203.51 ; C5.2@3596.32,2180.81 3596.32,2159.19 3600.51,2155 3684.36,2155 ; C3.2@3687.87,2180.81 3687.87,2158.51 3684.36,2155 ; C1.2@3779.43,2180.81 3779.43,2158.49 3775.94,2155 ; C9.2@3890.67,2180.81 3890.67,2155.33 3891,2155 ; C7.2@3982.22,2180.81 3982.22,2161.6 3975.62,2155 3891,2155 ; 3684.36,2155 3775.94,2155 ; 3775.94,2155 3891,2155
PUMP_VDD: C54.1 D5.1 D8.1 R18.2 U7.4 U10.4 | length 1095.8
  Top Layer w6: R18.2@3322,2363.29 3322.48,2362.81 U7.4@3393.08,2362.81 3393.08,2381.1 3421.98,2410 3439,2410 ; 3454,2410 3453,2409 3453,2384.17 3433.69,2364.86 3433.69,2295.52 3448.88,2280.33 3448.88,2217.12 3474.18,2191.82 U10.4@3487.57,2191.82
  Top Layer w8: 3439,2410 3454,2410 3582,2410 3608,2436 3790.59,2436 ; D5.1@3790.59,2404.49 3790.59,2436 ; C54.1@3941.43,2485 3941.43,2436.57 3942,2436 ; D8.1@4002.59,2404.49 4002.59,2430.41 3997,2436 3942,2436 ; 3790.59,2436 3800.59,2446 3830,2446 3840,2436 3942,2436
RESE: CON2.22 Q1.2 R7.1 | length 210.1
  Top Layer w10: v1(3637.8,1625.98) 3611.22,1625.98 R7.1@3595.47,1641.73 3595.47,1654.53 3604.33,1663.39 Q1.2@3657.48,1663.39
  Bottom Layer w10: CON2.22@3590.55,1584.65 3627.95,1584.65 3637.8,1594.49 v1(3637.8,1625.98)
RESET: B1.2 CON1.8 R2.1 U1.40 | length 768
  Top Layer w8: U1.40@3053.15,2246.06 3053.31,2246.22 3053.31,2338.9 3086.61,2372.21 v1(3086.61,2405.51)
  Bottom Layer w8: CON1.8@2858.27,2681.26 2858.27,2614.17 2893.7,2578.74 2984.25,2578.74 2992.13,2570.87 2992.13,2456.69 3044.63,2404.19 3085.29,2404.19 v1(3086.61,2405.51) B1.2@3086.61,2488.29 ; B1.2@3075.68,2519.68 3075.79,2519.8 3075.79,2561.91 R2.1@3075.79,2581.69
RX_D: M_BT.8 U1.38 | length 1747.9
  Top Layer w10: U1.38@3092.52,2246.06 3092.67,2246.21 3092.67,2279.53 3102.36,2289.21 v1(3102.36,2338.58)
  Bottom Layer w6: v1(3102.36,2338.58) 3103.34,2338.58 3107.41,2342.65 3222.3,2342.65 3226.25,2338.7 3226.3,2338.7 3263.19,2301.81 3300.54,2301.81 3318.35,2284 3350.8,2284 3375.99,2309.19 3574.01,2309.19 3699.43,2183.77 3814.5,2183.77 3872.03,2126.24 4087.84,2126.24 4156.8,2057.29 4156.8,1963.62 4115.12,1921.94 4102.86,1921.94 4082.68,1901.77 4082.68,1795.28 v7(4126.03,1751.92) 4127.26,1753.15 M_BT.8@4220.47,1753.15
SCK: CON2.12 M_GPS.6 SD1.5 U1.20 U2.9 | length 2208.6
  Top Layer w8: M_GPS.6@2303.15,1960.63 2303.15,2000 2311.02,2007.87 2416.34,2007.87 2424.21,2015.75 v1(2755.91,2015.75) ; U1.20@3033.46,1903.54 3033.46,1861.79 3029.68,1858 v9(3029.68,1804.22) 3029.68,1710.32 3040.53,1699.47 v5(3040.53,1576.8) 3063.33,1554 3079,1554 3106.3,1526.7 3106.3,1399.75 3098.27,1391.71 U2.9@3098.27,1371.53
  Bottom Layer w8: v1(2755.91,2015.75) 2790.35,1981.3 2790.35,1894.69 2818.9,1866.14 2866.14,1866.14 2901.28,1831 2954,1831 2977.83,1807.17 3029.83,1807.17 3029.68,1807.02 v9(3029.68,1804.22) 3059.55,1804.22 3072.6,1817.28 3124.24,1817.28 3126.56,1814.96 3226.44,1814.96 3352.01,1689.39 3463.01,1689.39 3555.12,1781.5 CON2.12@3574.8,1781.5 ; SD1.5@3041.18,1648.38 3043.31,1646.25 v5@3043.31,1572.87
SCK_IRQ: U1.26 U8.13 U19.2 | length 2714.9
  Top Layer w6: U8.13@2336.61,956.69 2435.58,956.69 2541.88,1062.99 2794.29,1062.99 v1(2811.1,1046.18) ; v8(3305,1119) 3355.28,1119 3359.25,1115.03 3719.24,1115.03 3742.47,1091.8 3742.47,988.19 3754.28,976.38 3811.02,976.38 3813.95,973.45 U19.2@3813.95,947.42
  Top Layer w8: U1.26@3175.2,1986.22 3214.57,1986.22 3219,1981.79 3219,1961.82 3205.91,1948.73 3205.91,1919.47 3223,1902.38 3223,1791.92 3229.54,1785.38 3229.54,1634.73 3295.3,1568.97 3295.44,1568.97 3303.15,1561.26 3303.15,1299.21 3317.71,1284.65 3317.71,1180.13 3305,1167.42 v8(3305,1119)
  Bottom Layer w6: v1(2811.1,1046.18) 2828.74,1046.18 2836.61,1054.06 3200.51,1054.06 3214.57,1040 3281,1040 3305,1064 v8(3305,1119)
SCL: R4.1 U1.32 U14.3 U18.6 | length 2603.1
  Top Layer w6: v1(3253,2187) 3245.09,2194.91 3245.09,2229.27 3203.64,2270.71 3203.64,2371.64 3229,2397 3229,2444.44 3211.65,2461.79 3211.65,2531.21 3270.99,2590.55 3425.2,2590.55 3488.19,2527.56 v1(3511.81,2527.56)
  Top Layer w8: U1.32@3175.2,2104.33 3211.61,2104.33 3245.08,2137.8 3245.08,2179.08 v1(3253,2187)
  Bottom Layer w6: v1(3253,2187) 3267.09,2187 3276.09,2196 3387.25,2196 3412.44,2221.19 3537.56,2221.19 3662.98,2095.77 3778.05,2095.77 3873.64,2000.19 3873.64,1433.36 3904,1403 3992,1403 4000,1411 R4.1@4000,1436.29 4034.72,1436.29 4055.12,1456.69 4116.64,1456.69 4130.91,1470.96 4181.1,1470.96 U14.3@4181.1,1443.9 ; v1(3511.81,2527.56) 3535.43,2527.56 3543.31,2535.43 U18.6@3543.31,2551.18
  other v7: 4078,1457
SD_CS: SD1.2 U1.13 U2.23 | length 939.3
  Top Layer w6: 2759,1316 2759,1366
  Top Layer w8: 2759,1316 2759,1313 2779.21,1292.79 2842.36,1292.79 U2.23@2842.36,1291.66 ; 2759,1366 2759,1382.06 2794.26,1417.32 2817.26,1417.32 2862.61,1462.67 2862.61,1494.61 v5(2911,1543) 2911,1821.28 2889.76,1842.52 2889.76,1862.2 2895.67,1868.11 U1.13@2895.67,1903.54
  Bottom Layer w8: v5(2911,1543) 2911,1585.74 ; 2911,1585.74 2911.26,1586 SD1.2@2911.26,1648.38 2911,1648.12 2911,1585.74
SD_DATA1: SD1.8 U2.4 | length 483
  Top Layer w8: U2.4@3098.27,1273.1 3159.78,1273.1 3194.1,1307.43 3194.1,1414.2 3135.05,1473.25 3135.05,1507.87 3170.48,1543.31 3170.83,1543.31 v5@3170.83,1569.36
  Bottom Layer w8: v5@3171.1,1576.8 SD1.8@3171.1,1648.38
  other v5: 3170.83,1576.8
SD_DATA2: SD1.1 U2.25 | length 525.4
  Top Layer w6: 2746.84,1301 2746.84,1386.87 2793.04,1433.07
  Top Layer w8: 2746.84,1301 2794.42,1253.42 U2.25@2842.36,1253.42 ; 2793.04,1433.07 2814.62,1433.07 2848.91,1467.37 2848.91,1557.76 v5(2867.95,1576.8)
  Bottom Layer w8: v5(2867.95,1576.8) SD1.1@2867.95,1648.38
SD_DETECT: SD1.CD1 U1.12 U2.26 | length 943.9
  Top Layer w6: 2733.84,1303.15 2733.84,1370.08
  Top Layer w8: 2733.84,1303.15 2733.84,1291 2791.11,1233.73 U2.26@2842.36,1233.73 ; 2733.84,1370.08 2733.84,1392.26 2790.4,1448.82 2811.98,1448.82 2832,1468.84 2832,1560.59 v5@2818.74,1573.85 ; v5(2818.74,1576.8) 2832.68,1590.74 U1.12@2832.68,1966.54
  Bottom Layer w8: v5@2818.74,1573.85 SD1.CD1@2818.74,1648.38
SD_RST: Q2.1 U1.16 U2.18 | length 1717.8
  Top Layer w8: U2.18@2891.57,1420.74 2891.57,1444.85 2913,1466.28 v1(2913,1468) ; v1(2943,1537) 2943,1543.22 2931.46,1554.75 2931.46,1712.86 2955.81,1737.21 2955.81,1902.46 U1.16@2954.72,1903.54 ; v1(3353,1373) 3369,1373 3374.6,1367.4 Q2.1@3374.6,1326.88
  Bottom Layer w8: v1(2943,1537) 2918,1512 2918,1473 v1(2913,1468) 2870.2,1425.2 2860.58,1425.2 2839.33,1403.95 2839.33,1253.84 2803.9,1218.41 2803.9,1166.24 2818.98,1151.16 2902.43,1151.16 2941.79,1111.8 3147.23,1111.8 3208.66,1173.23 3208.66,1346.46 3235.2,1373 v1(3353,1373)
SDA: R5.1 U1.31 U14.4 U18.1 | length 2509.7
  Top Layer w6: 3261.15,2228 3256.09,2233.06 3256.09,2233.82 3214.64,2275.27 3214.64,2367.09 3240,2392.44 3240,2449 3222.65,2466.35 3222.65,2526.65 3274.74,2578.74 3405.51,2578.74 v1(3456.69,2527.56)
  Top Layer w8: U1.31@3175.2,2084.65 3216.12,2084.65 3258.08,2126.6 3258.08,2162.07 3273.81,2177.8 3273.81,2201.19 3265,2210 v1(3265,2216)
  Bottom Layer w6: v1(3265,2216) 3274,2207 3382.7,2207 3407.89,2232.19 3542.12,2232.19 3667.54,2106.77 3782.61,2106.77 3884.64,2004.74 3884.64,1490 3891.57,1483.06 3926.63,1483.06 ; U18.1@3425.2,2551.18 3425.2,2535.43 3433.07,2527.56 v1(3456.69,2527.56) ; R5.1@3926.63,1437.29 3926.63,1483.06 ; U14.4@4196.85,1443.9 4196.85,1473.15 4186.94,1483.06 4131.11,1483.06 4119.09,1495.08 4078.94,1495.08 4066.93,1483.06 3926.63,1483.06
  other v7: 4109,1495.08
SWDCLK: CON1.1 R1.1 U1.45 | length 334.9
  Top Layer w8: U1.45@2954.72,2246.06 2954.72,2299.21 2972.44,2316.93 2972.44,2391.73 2954.72,2409.45 v1@2954.72,2430.12 ; v1(2954.72,2435.04) v1@2954.72,2430.12 ; R1.1@3011.81,2430.12 v1@2954.72,2430.12
  Bottom Layer w8: v1(2954.72,2435.04) 2954.72,2504.17 CON1.1@2958.27,2507.72
SWDIO: CON1.3 U1.46 | length 349.4
  Top Layer w8: v1(2862.2,2429.13) 2923.23,2429.13 2935.04,2417.32 2935.04,2409.45 2959.44,2385.05 2959.44,2329.52 2935.04,2305.12 U1.46@2935.04,2246.06
  Bottom Layer w8: CON1.3@2858.27,2507.72 2862.2,2503.78 v1(2862.2,2429.13)
TX_D: M_BT.7 U1.37 | length 1759
  Top Layer w8: U1.37@3112.2,2246.06 3112.2,2269.68 3129.92,2287.4 v1(3129.92,2322.83)
  Bottom Layer w6: v1(3129.92,2322.83) 3226.61,2322.83 3242.22,2307.22 ; 3241.28,2306.28 3256.75,2290.81 3295.99,2290.81 3313.8,2273 3355.36,2273 3380.55,2298.19 3569.46,2298.19 3694.87,2172.77 3809.95,2172.77 3867.47,2115.24 4083.28,2115.24 4145.8,2052.73 4145.8,1968.17 4110.57,1932.94 4098.3,1932.94 4070.87,1905.51 4070.87,1791.53 4086,1776.4 v7(4086,1706) 4086.09,1705.91 M_BT.7@4220.47,1705.91
USBD+: U1.34 USB_PROG.3 | length 651.4
  Top Layer w8: USB_PROG.3@2919,2583 2919,2527.62 2983.62,2463 3070.58,2463 3108.79,2424.79 3108.79,2375.83 3150.73,2333.88 3150.73,2288.27 3216.54,2222.46 3216.54,2149.61 3210.63,2143.7 U1.34@3175.2,2143.7
USBD-: U1.33 USB_PROG.2 | length 672.5
  Top Layer w8: USB_PROG.2@2944.59,2583 2944.59,2520.41 2989,2476 3075.96,2476 3121.79,2430.17 3121.79,2381.21 3163.73,2339.27 3163.73,2293.65 3231.09,2226.3 3231.09,2144.47 3210.63,2124.02 U1.33@3175.2,2124.02
VUSB: C43.2 U3.5 U12.4 USB_SD.1 | length 1349.3
  Top Layer w20: v6(4244.09,1287.4) 4270.67,1313.98 C43.2@4270.67,1337.05 ; C43.2@4274.61,1337.05 4310.04,1372.48 4400.04,1372.48 4411.85,1384.29 U12.4@4411.85,1413.82
  Bottom Layer w12: USB_SD.1@3507.87,940.94 3507.87,996.06
  Bottom Layer w20: 3507.87,996.06 3507.87,1031.5 3547.24,1031.5 3565.94,1050.2 3565.94,1114.17 ; U3.5@3523.62,1114.17 3565.94,1114.17 ; v6(4244.09,1287.4) 4227.13,1270.43 4030.46,1270.43 4029.87,1271.02 3921.02,1162.17 3830.83,1162.17 3779,1214 3586.74,1214 3565.94,1193.21 3565.94,1114.17
VUSB_PROG: D11.K USB_PROG.1 | length 293.9
  Top Layer w10: USB_PROG.1@2970.18,2583 2970.18,2522.82 2986,2507 3096,2507 3157.18,2445.82 D11.K@3157.18,2431
pads on no net: BUT1.9 BUT1.10 CON1.2 CON1.4 CON1.5 CON1.6 CON1.7 CON2.18 CON2.19 CON2.24 CON2.mount1 CON2.mount2 M_BT.1 M_BT.3 M_BT.4 M_BT.5 M_BT.6 M_BT.9 M_BT.11 M_BT.12 M_BT.15 M_GPS.2 M_GPS.7 M_GPS.23 M_GPS.24 M_GPS.28 M_GPS.29 M_GPS.30 SD1.hole U2.1 U2.7 U2.8 U2.10 U2.12 U2.15 U2.16 U2.17 U2.19 U2.20 U2.24 U2.27 U2.29 U2.31 U3.1 U3.6 U4.1 U8.2 U8.3 U8.4 U8.9 U8.10 U8.11 U9.4 U11.4 U12.1 U13.PAD1 U14.1 U14.8 U14.9 U18.0 U18.3 U19.7 USB_PROG.4

## Polygon pours and split planes (outlines as drawn)
GND on Top Layer "GND_TOP" (solid, remove dead copper, pour order 14): 1921.26,2826.77 1921.26,708.66 4744.09,708.66 4744.09,2853.4
VUSB on Top Layer "vusb_top" (solid, pour order 8): 4460.63,1397.64 4460.63,1527.56 4311.02,1527.56 4311.02,1397.64
BATT+ on Top Layer "Batt+_top" (solid, pour order 10): 4468.5,1397.64 4468.5,1527.56 4665.35,1527.56 4665.35,1413.39 4665.35,1397.64
GND on Bottom Layer "GND_BOT" (solid, remove dead copper, pour order 16): 1889.76,2853.35 1889.76,735.24 4840.55,735.24 4840.55,2881.18
BATT+ on Bottom Layer "Batt+_bot" (solid, pour order 6): 4311.02,1397.64 4311.02,1511.81 4663.74,1511.81 4663.74,1413.39 4663.74,1397.64
3V3 on Bottom Layer "3V3_arm" (solid, remove dead copper, pour order 12): 2862.2,2214.57 2862.2,1944.16 3143.7,1944.16 3143.7,2214.57 3089.57,2214.57

## Other copper
Top Layer:
  rectangle net GND: 3029,2529 3116.21,2638.61
  rectangle net GND: 2712,2513 2843,2633
  rectangle net GND: 2708,2623 3126,2747
  rectangle net BATT+: 4485.31,1397.64 4558.86,1436.61
  rectangle net VUSB: 4370.08,1397.64 4452.76,1448.82
  pour cut-out: 2968.5,985.87 2968.5,890.24 2984.41,874.33 3045.94,874.33 3055.12,883.51 3023.62,915.01 3023.62,1005.56
  pour cut-out: 2866.14,1157.48 2866.14,1104.36 2866.14,895.32 2940.94,820.52 3054.74,820.52 3149.61,915.39 3149.61,1161.42 3112.17,1198.85 3123.98,1198.85 3157.48,1165.35 3157.48,1110.24 3212.6,1110.24 3212.6,1047.24 3157.48,1047.24 3157.48,909.45 3056.03,808 2922.35,808 2850.39,879.95 2850.39,1088.61 2850.39,1157.48
Bottom Layer:
  rectangle net GND: 3560.12,796 3655,1006.06
  rectangle net GND: 3259.48,795.83 3357,1010
  pour cut-out: 4212.6,1460.63 4240.16,1460.63 4255.91,1444.88
  pour cut-out: 3321.66,2620.9 3321.66,2563.75 3389.76,2563.75 3389.76,2620.9

## Silkscreen, mask and mechanical layers (free items; w line width, h text height)
Top Overlay:
  lines w10: 3476.38,1559.06 3476.38,1598.43 3484.25,1606.3 ; 4082.68,977.36 4082.68,1038.39 ; 4090.55,977.36 4090.55,1038.39
  text "RX" at 4088,1798 h35
  text "MISO /  SCK / MOSI" at 2857.28,1719.49 h30
  text "TX" at 4070,1632 h35
  text "SCL /  SDA" at 4137.8,1307.09 h30 r90
  text "Jan Zamb / Vario 1.5 / May 2021" at 2007.87,1161.42 h50
  text "+" at 4015.75,1094.49 h55 r270
  text "MISO /  SCK / MOSI  IRQ" at 3295,1033 h30
  text "+-" at 4129.92,952.76 h55 r270
Bottom Overlay:
  circle w10: c3456.69,2515.75 r8.8
  lines w3.94: 3951.05,2539.37 3951.05,2671.26 4067.19,2671.26 4067.19,2539.37 3951.05,2539.37 ; 4000,814.96 4127.95,814.96 4127.95,982.28 4000,982.28 4000,814.96
  lines w10: 2816.08,2428.47 2897.08,2428.47 ; 2816.08,2438.47 2897.08,2438.47 ; 2722.08,2535.09 2997.08,2535.09 2997.08,2645.09 2722.08,2645.09 2722.08,2535.09
  text "MOSI /  SCK /   MISO" at 2850.39,1877.95 h30 r180
  text "RX" at 4086,1828 h35 r180
  text "TX" at 4069,1674 h35 r180
  text "SCL / SDA" at 4158,1643 h30 r90
  text "Jan Zamb / Vario 1.5 / May 2021" at 2034,1426 h50 r180
  text "MOSI / SCK / MISO" at 3413.39,1318.9 h30 r90
  text "+-" at 4192.91,940.94 h55 r90
Top Solder:
  region: 4724.41,1062.99 4724.41,1586.61 4303.15,1586.61 4303.15,1388.46 4562.99,1388.46 4562.99,1062.99
Bottom Solder:
  region: 4728.35,1094.49 4570.87,1094.49 4570.87,1397.64 4303.15,1397.64 4303.15,1555.12 4728.35,1555.12
Mechanical 2:
  lines w7.87: 3349.17,2563.32 ccw(c3484.25,2590.55) 3349.47,2619.23 ; 3350.39,2562.99 3389.76,2562.99 ; 3350.39,2618.83 3389.76,2618.83 ; 3389.63,2563.44 ccw(c3484.25,2590.55) 3390.04,2619.03 ; 1968.5,787.4 1968.5,2507.87 1968.5,2755.91 4067.9,2755.91 4067.9,2577.78 ccw(c4389.76,2460.63) 4047.24,2460.63 4047.24,2421.26 ccw(c4389.76,2421.26) 4389.76,2078.74 4484.25,2078.74 4547.24,2015.75 4547.24,1594.49 4704.72,1594.49 4724.41,1574.8 4724.41,1122.05 cw(c4389.76,1122.05) 4389.76,787.4 3996.06,787.4 3996.06,984.25 3937.01,1043.31 3918.39,1043.31 3759.84,1043.31 3759.84,1003.94 3917.32,1003.94 3956.69,964.57 3956.69,854.29 3956.69,826.77 3917.32,787.4 3871.8,787.4 3740.16,787.4 3700.79,826.77 3700.79,1043.31 3661.42,1043.31 3661.42,787.4 2834.65,787.4 1968.5,787.4
  lines w10: 3897.64,1496.06 3897.64,2047.24 4055.12,2047.24 4055.12,1496.06 3897.64,1496.06
Mechanical 3:
  circle w7.87: c3484.25,2590.55 r165.35
  circle w7.87: c3484.25,2590.55 r125.98
  circle w10: c4543.31,917.32 r118.11
  circle w10: c4291.34,866.14 r118.11
  circle w10: c2598.43,866.14 r118.11
  circle w10: c2559.06,2677.17 r118.11
  circle w10: c3818.9,2677.17 r118.11